# Altium PCB PCBTP.PcbDoc
Units mm, origin at the board's own origin, x right, y up, seen from the top; angles counter-clockwise.
Board outline 152.4 x 101.6 mm, 2 copper layers (Top Layer, Bottom Layer); 36 components, 0 nets, 142 pads, 0 vias.
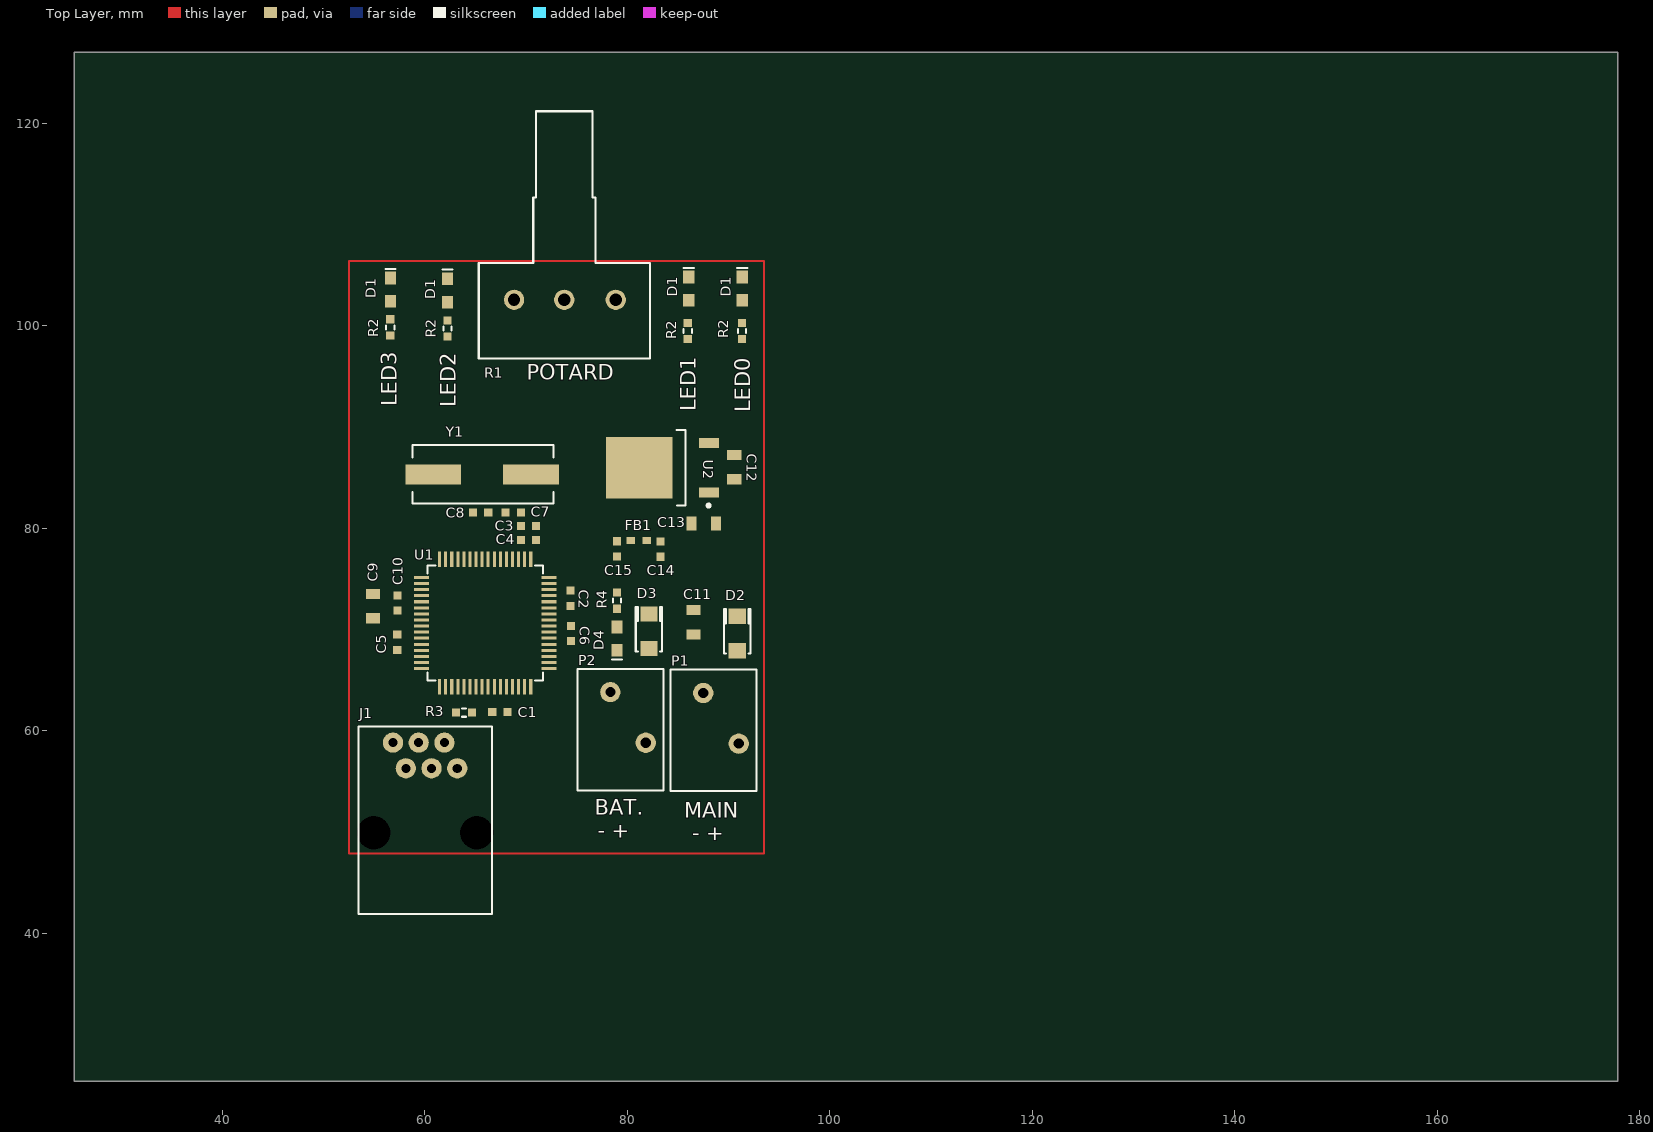
[diagram p0: Top Layer view]
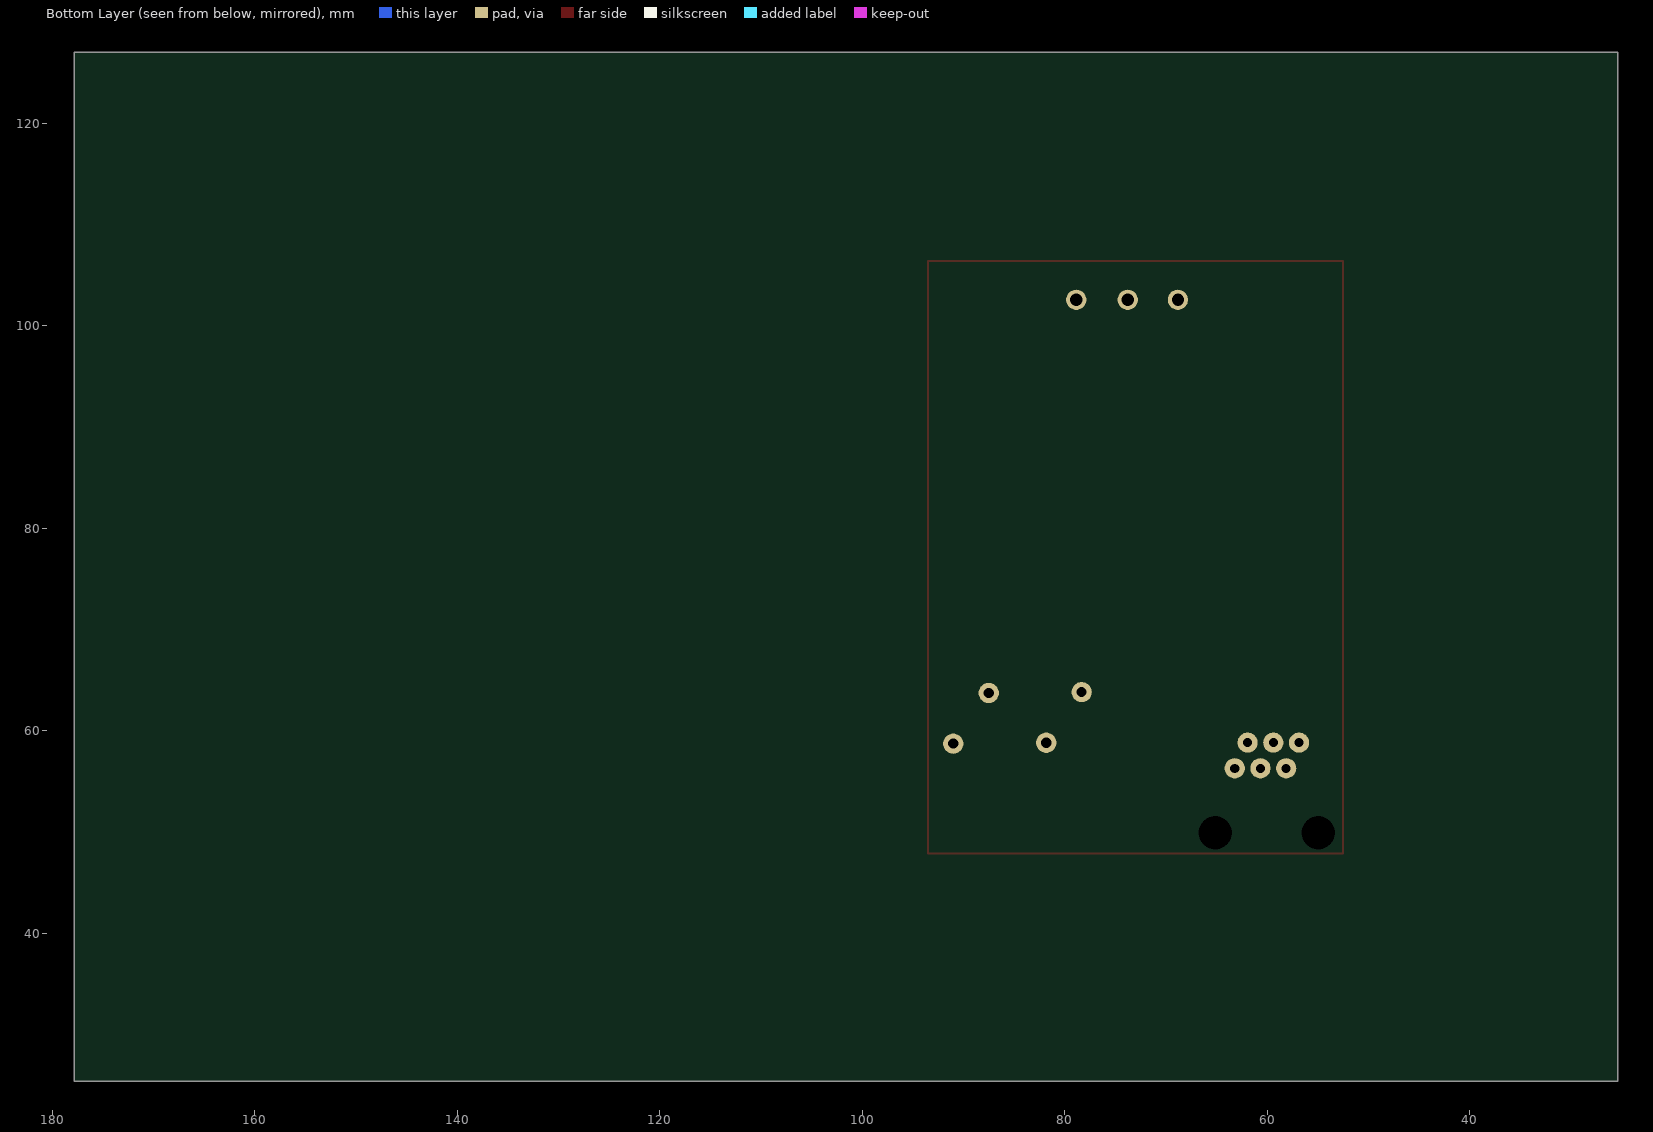
[diagram p1: Bottom Layer view, seen from below]

## Layer stack, top to bottom
Top Solder: solder mask 0.0102, Solder Resist, Dk 3.5
Top Layer: signal copper 0.0356
Dielectric 1: dielectric 0.32, FR-4, Dk 4.8
Bottom Layer: signal copper 0.0356
Bottom Solder: solder mask 0.0102, Solder Resist, Dk 3.5

## Board outline
25.4,25.4 177.8,25.4 177.8,127 25.4,127

## Design rules (kind name [scope] priority, off if disabled: settings)
Clearance [All] p1: gap=0.254
PolygonConnect [All] p1: connectstyle=Relief reliefconductorwidth=0.254 reliefentries=4 polygonreliefangle="90 Angle" airgapwidth=0.254
RoutingVias [All] p1: holewidth=0.711 width=1.27 viastyle="Through Hole" minholewidth=0.711 minwidth=1.27 maxholewidth=0.711 maxwidth=1.27
SolderMaskExpansion [All] p1: expansion=0.102
UnpouredPolygon [All] p1: allowunpoured=FALSE
Width [All] p1: maxlimit=0.254 minlimit=0.254 preferedwidth=0.254
29 further rules are at their usual default settings.

## Components (designator, comment, footprint, x,y, rotation, side; value= is the part's Value field where it differs from the comment)
C1 "" CAPC1608N 69.005,62.045 r180 top
C2 "" CAPC1608N 74.204,74.677 r270 top
C3 "" CAPC1608N 68.661,80.005 r0 top
C4 "" CAPC1608N 68.661,78.63 r0 top
C5 "" CAPC1608N 57.49,67.158 r90 top
C6 "" CAPC1608N 74.247,71.197 r270 top
C7 "" CAPC1608N 67.158,81.337 r0 top
C8 "" CAPC1608N 63.935,81.337 r0 top
C9 "" CAPC2012N 55.488,71.322 r90 top
C10 "" CAPC1608N 57.533,71.025 r90 top
C11 "" CAPC2012N 87.155,69.714 r90 top
C12 "" CAPC2012N 91.168,85.036 r90 top
C13 "" CAPC2012N 88.551,81.081 r180 top
C14 "" CAPC1608N 83.506,76.351 r90 top
C15 "" CAPC1608N 79.202,76.378 r90 top
D1 "" "LED 0805N" 91.358,103.655 r270 top
D1 "" "LED 0805N" 86.076,103.655 r270 top
D1 "" "LED 0805N" 62.262,103.482 r270 top
D1 "" "LED 0805N" 56.633,103.569 r270 top
D2 "" "GF1A Diode" 90.859,69.614 r270 top
D3 "" "GF1A Diode" 82.14,69.822 r270 top
D4 "" "LED 0805N" 78.979,69.103 r90 top
FB1 "" INDC1608AN 81.129,78.8 r180 top
J1 "" RJ12_90 53.447,60.436 r270 top
P1 "" PHOENIX_1985195 84.258,54.036 r0 top
P2 "" PHOENIX_1985195 75.078,54.122 r0 top
R1 "POTARD" POTARD 73.781,102.56 r0 top
R2 "" RESC1608N 56.6,99.841 r270 top
R2 "" RESC1608N 62.264,99.724 r270 top
R2 "" RESC1608N 85.974,99.489 r270 top
R2 "" RESC1608N 91.325,99.489 r270 top
R3 "" RESC1608N 63.885,61.79 r0 top
R4 "" RESC1608N 78.977,72.855 r270 top
U1 "Comment" QFP50P1200X1200X120-64 60.271,64.947 r90 top
U2 "Comment" TD03B_N 81.185,85.977 r90 top
Y1 "" "HC49/4H SMX CRYSTAL" 65.676,85.304 r0 top

## Footprints (in the part's own frame and the unit in brackets; to place one, negate y for a bottom-side part, rotate by r counter-clockwise, add the part's x,y. Pads: shape width x height; smd on the part's side, far side on the other; paste and mask are expansions set on the pad)
CAPC1608N [mm]
  rect 0.8x0.8 smd: 0(0.838,0.203) 0(2.337,0.203)
CAPC2012N [mm]
  rect 1x1.4 smd: 0(-0.2,0.6) 0(2.2,0.6)
"GF1A Diode" [mm]
  rect 1.5x1.7 smd: 1(-1.7,0) 2(1.7,0)
  silkscreen extent -2.4,-1.3 2,1.3
"HC49/4H SMX CRYSTAL" [mm]
  rect 5.5x2 smd: 1(-4.826,0) 2(4.826,0)
  silkscreen extent -6.86,-2.86 7.04,2.94
INDC1608AN [mm]
  rect 0.85x0.7 smd: 1(-0.8,0) 2(0.8,0)
"LED 0805N" [mm]
  rect 1.25x1.1 smd: 1(-1.15,0) 2(1.15,0)
  silkscreen extent -2.05,-0.5 -2.05,0.5
PHOENIX_1985195 [mm]
  round 2 hole 1: 0(3.25,9.7) 1(6.75,4.7)
  silkscreen extent 0,0 8.5,12
POTARD [mm]
  round 2 hole 1.2: 12(-4.953,0) 12(0,0) 12(5.08,0)
  silkscreen extent -8.45,-5.8 8.45,18.62
QFP50P1200X1200X120-64 [mm]
  rect 1.5x0.3 smd mask+0.102: 7(-0.6,-1.8) 7(-0.6,-1.2) 7(-0.6,-3.6) 7(-0.6,-3) 7(-0.6,-2.4) 7(-0.6,-4.8) 7(-0.6,-4.2) 7(-0.6,-6.6) 7(-0.6,-6) 7(-0.6,-5.4) 7(-0.6,-7.8) 7(-0.6,-7.2) 7(-0.6,-9) 7(-0.6,-8.4) 7(-0.6,-10.2) 7(-0.6,-9.6) 7(12,-10.2) 7(12,-9.6) 7(12,-9) 7(12,-8.4) 7(12,-7.8) 7(12,-7.2) 7(12,-6.6) 7(12,-6) 7(12,-5.4) 7(12,-4.8) 7(12,-4.2) 7(12,-3.6) 7(12,-3) 7(12,-2.4) 7(12,-1.8) 7(12,-1.2)
  rect 0.3x1.5 smd mask+0.102: 7(1.2,-12) 7(1.2,0.6) 7(1.8,-12) 7(1.8,0.6) 7(2.4,-12) 7(2.4,0.6) 7(3,-12) 7(3,0.6) 7(3.6,-12) 7(3.6,0.6) 7(4.2,-12) 7(4.2,0.6) 7(4.8,-12) 7(4.8,0.6) 7(5.4,-12) 7(5.4,0.6) 7(6,-12) 7(6,0.6) 7(6.6,-12) 7(6.6,0.6) 7(7.2,-12) 7(7.2,0.6) 7(7.8,-12) 7(7.8,0.6) 7(8.4,-12) 7(8.4,0.6) 7(9,-12) 7(9,0.6) 7(9.6,-12) 7(9.6,0.6) 7(10.2,-12) 7(10.2,0.6)
  silkscreen extent 0,-11.4 11.4,0
RESC1608N [mm]
  rect 0.8x0.8 smd: 1(-0.8,0) 2(0.8,0)
  silkscreen extent -0.2,-0.4 0.2,0.4
RJ12_90 [mm]
  round 2 hole 0.9 mask+0.102: 6(1.6,8.5) 6(1.6,5.96) 6(1.6,3.42) 6(4.14,7.23) 6(4.14,9.77) 6(4.14,4.69)
  round 0 hole 3.3: 7(10.5,11.68) 7(10.5,1.52)
  silkscreen extent 0,0 18.5,13.2
TD03B_N [mm]
  rect 1x2 smd mask+0.102: 3(-2.45,-6.886) 4(2.45,-6.886)
  rect 6.1x6.6 smd mask+0.102: 4(0,0)
  silkscreen extent -3.88,-7 3.75,-3.68

## Nets (pads, with @x,y where several pads share a name; then routed paths per layer and width w, separated by ;. In a path a pad name is that pad's centre, name@x,y a point inside that pad or via, vN(x,y) a via of type N, cw(c..) or ccw(c..) an arc to the next point about the centre after c; other vN are vias at no path point)
pads on no net: C1.0 C2.0 C3.0 C4.0 C5.0 C6.0 C7.0 C8.0 C9.0 C10.0 C11.0 C12.0 C13.0 C14.0 C15.0 D1.1 D1.2 D2.1 D2.2 D3.1 D3.2 D4.1 D4.2 FB1.1 FB1.2 J1.6 J1.7 P1.0 P1.1 P2.0 P2.1 R1.12 R2.1 R2.2 R3.1 R3.2 R4.1 R4.2 U1.7 U2.3 U2.4 Y1.1 Y1.2
copper on no net: | length 199
  Top Layer w0.2: 52.524,47.887 52.524,106.387 93.524,106.387 93.524,47.887 52.524,47.887

## Silkscreen, mask and mechanical layers (free items; w line width, h text height)
Top Overlay:
  text "POTARD" at 70.056,94.649 h1.52
  text "LED3" at 57.24,92.051 h1.52 r90
  text "LED2" at 63.041,91.964 h1.52 r90
  text "LED1" at 86.769,91.532 h1.52 r90
  text "LED0" at 92.138,91.445 h1.52 r90
  text "BAT." at 76.81,51.698 h1.52
  text "MAIN" at 85.643,51.438 h1.52
  text "- +" at 77.07,49.446 h1.52
  text "- +" at 86.422,49.186 h1.52